# Altium PCB Teeth_Radiology_PCB.PcbDoc (part 2 of 2)
Units mm, origin at the board's own origin, x right, y up, seen from the top; angles counter-clockwise.
Board outline 199.64 x 96.9 mm, 2 copper layers (Top Layer, Bottom Layer); 127 components, 118 nets, 427 pads, 81 vias.
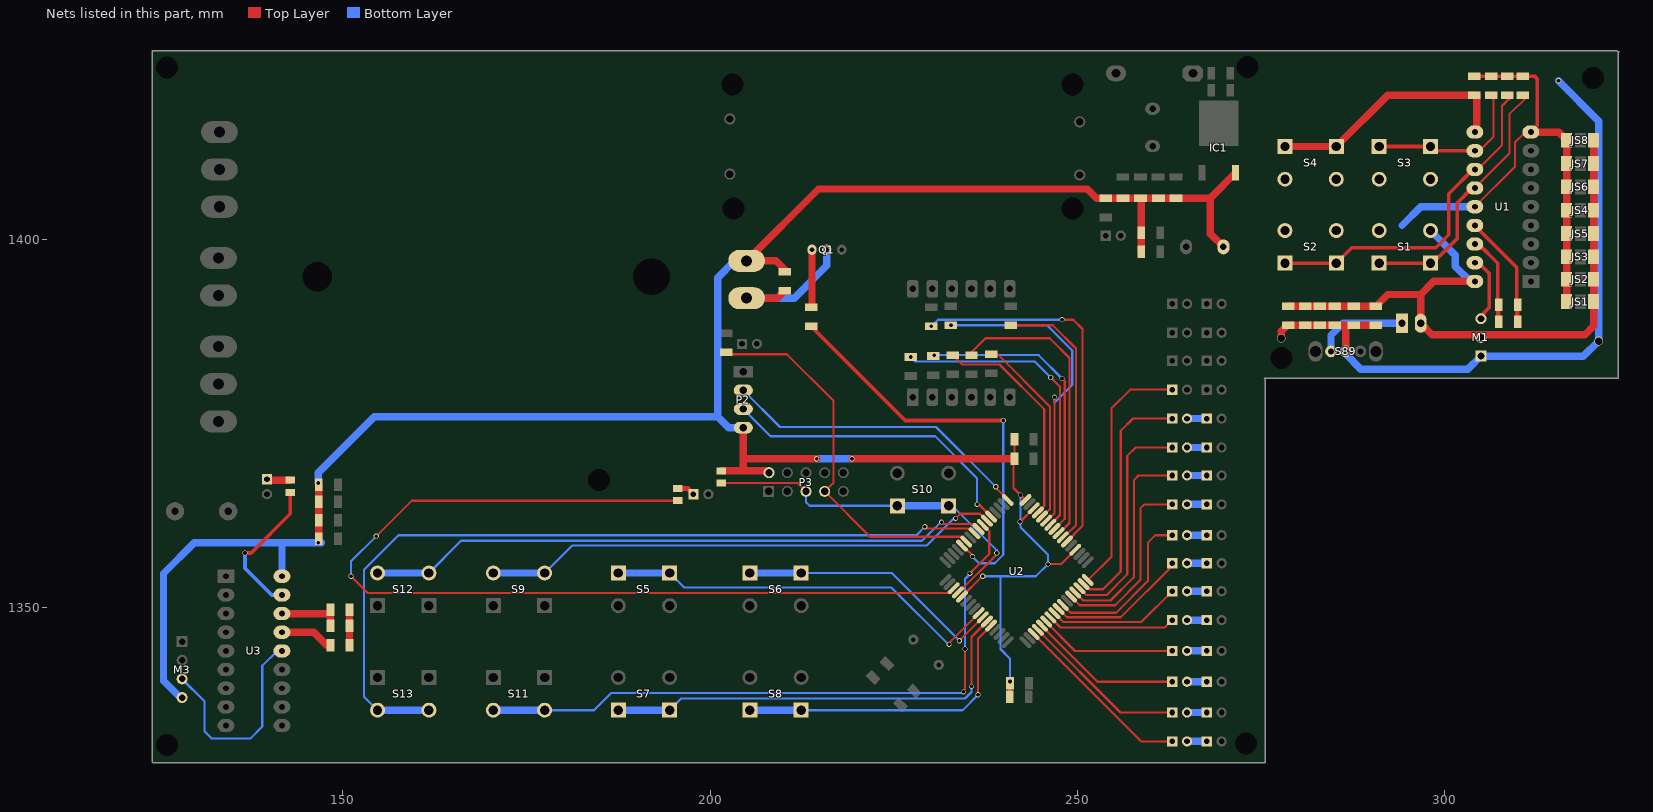
[diagram p2: the nets of this part, all layers, seen from the top]

## Via types
v1: diameter 0.7, hole 0.5, Top Layer to Bottom Layer, 75 vias
v2: diameter 1.2, hole 1, Top Layer to Bottom Layer, 5 vias
v3: diameter 1, hole 0.7, Top Layer to Bottom Layer, 1 vias

## Nets (pads, with @x,y where several pads share a name; then routed paths per layer and width w, separated by ;. In a path a pad name is that pad's centre, name@x,y a point inside that pad or via, vN(x,y) a via of type N, cw(c..) or ccw(c..) an arc to the next point about the centre after c; other vN are vias at no path point) (continued)
NetLED10_1: LED10.1 U2.48 | length 34.1
  Top Layer w0.3: U2.48@251.407,1353.705 251.407,1353.64 254.635,1356.868 254.635,1377.061 257.175,1379.601 LED10.1@262.89,1379.601
NetLED11_1: LED11.1 LED12.2 | length 2.7
  Bottom Layer w1: LED12.2@264.922,1375.664 LED11.1@267.589,1375.664
NetLED12_1: LED12.1 U2.47 | length 33.2
  Top Layer w0.3: U2.47@250.839,1353.137 251.171,1352.804 251.206,1352.804 251.587,1352.423 253.492,1352.423 255.905,1354.836 255.905,1374.013 257.556,1375.664 LED12.1@262.89,1375.664
NetLED13_1: LED13.1 LED14.2 | length 2.7
  Bottom Layer w1: LED14.2@264.922,1371.727 LED13.1@267.589,1371.727
NetLED14_1: LED14.1 U2.46 | length 30.8
  Top Layer w0.3: U2.46@250.273,1352.571 251.183,1351.661 254,1351.661 256.794,1354.455 256.794,1370.584 257.937,1371.727 LED14.1@262.89,1371.727
NetLED15_1: LED15.1 LED17.2 | length 2.7
  Bottom Layer w1: LED17.2@264.922,1335.659 LED15.1@267.589,1335.659
NetLED16_1: LED16.1 LED18.2 | length 2.7
  Bottom Layer w1: LED18.2@264.922,1331.722 LED16.1@267.589,1331.722
NetLED17_1: LED17.1 U2.36 | length 22.9
  Top Layer w0.3: U2.36@244.616,1346.914 255.871,1335.659 LED17.1@262.89,1335.659
NetLED18_1: LED18.1 U2.35 | length 24.9
  Top Layer w0.3: U2.35@244.05,1346.348 258.677,1331.722 LED18.1@262.89,1331.722
NetLED19_1: LED19.1 LED20.2 | length 2.7
  Bottom Layer w1: LED20.2@264.922,1367.917 LED19.1@267.589,1367.917
NetLED20_1: LED20.1 U2.45 | length 29.2
  Top Layer w0.3: U2.45@249.056,1352.52 249.436,1352.141 U2.45@249.707,1352.141 ; U2.45@249.707,1352.005 250.813,1350.899 254.508,1350.899 257.683,1354.074 257.683,1367.282 258.318,1367.917 LED20.1@262.89,1367.917
NetLED21_1: LED21.1 LED22.2 | length 2.7
  Bottom Layer w1: LED22.2@264.922,1339.85 LED21.1@267.589,1339.85
NetLED22_1: LED22.1 U2.37 | length 20.9
  Top Layer w0.3: U2.37@245.182,1347.48 245.182,1347.398 252.73,1339.85 LED22.1@262.89,1339.85
NetLED23_1: LED23.1 LED24.2 | length 2.7
  Bottom Layer w1: LED24.2@264.922,1363.98 LED23.1@267.589,1363.98
NetLED24_1: LED24.1 U2.44 | length 25.6
  Top Layer w0.3: U2.44@249.141,1351.44 250.317,1350.264 255.143,1350.264 258.572,1353.693 258.572,1363.472 259.08,1363.98 LED24.1@262.89,1363.98
NetLED25_1: LED25.1 LED26.2 | length 2.7
  Bottom Layer w1: LED26.2@264.922,1344.041 LED25.1@267.589,1344.041
NetLED26_1: LED26.1 U2.38 | length 18.8
  Top Layer w0.3: U2.38@245.747,1348.045 245.747,1347.976 249.682,1344.041 LED26.1@262.89,1344.041
NetLED27_1: LED27.1 LED28.2 | length 2.7
  Bottom Layer w1: LED28.2@264.922,1348.232 LED27.1@267.589,1348.232
NetLED28_1: LED28.1 U2.39 | length 17.6
  Top Layer w0.3: U2.39@246.313,1348.611 247.708,1347.216 261.874,1347.216 LED28.1@262.89,1348.232
NetLED29_1: LED29.1 LED30.2 | length 2.7
  Bottom Layer w1: LED30.2@264.922,1352.169 LED29.1@267.589,1352.169
NetLED30_1: LED30.1 U2.40 | length 18.4
  Top Layer w0.3: U2.40@247.014,1349.177 U2.40@246.879,1349.177 248.078,1347.978 258.699,1347.978 LED30.1@262.89,1352.169
NetLED31_1: LED31.1 LED32.2 | length 2.7
  Bottom Layer w1: LED32.2@264.922,1355.979 LED31.1@267.589,1355.979
NetLED32_1: LED32.1 U2.41 | length 19.2
  Top Layer w0.3: U2.41@247.444,1349.742 248.574,1348.613 255.905,1348.613 262.89,1355.598 LED32.1@262.89,1355.979
NetLED33_1: LED33.1 LED34.2 | length 2.7
  Bottom Layer w1: LED34.2@264.922,1359.789 LED33.1@267.589,1359.789
NetLED34_1: LED34.1 U2.42 | length 22.7
  Top Layer w0.3: U2.42@248.01,1350.308 249.07,1349.248 255.27,1349.248 259.588,1353.566 259.588,1358.773 260.604,1359.789 LED34.1@262.89,1359.789
NetLED35_1: LED35.1 R20.2 | length 2.5
  Top Layer w0.7: R20.2@195.58,1366.138 196.978,1366.138 LED35.1@197.739,1365.377
NetLED36_1: LED36.1 R21.2 | length 3.2
  Top Layer w1: LED36.1@139.7,1367.409 139.828,1367.281 R21.2@142.875,1367.281
NetM1_2: M1.2 U1.17 | length 8.8
  Top Layer w0.5: U1.17@304.094,1396.873 304.602,1396.873 306.07,1395.405 306.07,1390.777 M1.2@304.927,1389.634
NetM3_2: M3.2 U3.14 | length 29.1
  Bottom Layer w0.3: M3.2@128.143,1340.231 131.191,1337.183 131.191,1333.119 132.207,1332.103 137.414,1332.103 139.065,1333.754 139.065,1342.009 141.097,1344.041 U3.14@141.732,1344.041
NetP1_1: P1.1 S89.1 | length 12.5
  Bottom Layer w1: S89.1@284.512,1384.808 284.512,1386.999 286.155,1388.642 P1.1@294.178,1388.642
NetP2_3: P2.3 U2.5 | length 41.9
  Top Layer w0.3: v1(236.347,1363.98) 236.601,1363.98 U2.5@238.252,1362.329
  Bottom Layer w0.3: P2.3@204.524,1376.964 208.237,1373.251 230.632,1373.251 236.347,1367.536 v1(236.347,1363.98)
NetQ1_2: Q1.2 R8.1 T3.2 | length 20.6
  Top Layer w1: T3.2@204.978,1392.047 209.169,1392.047 R8.1@210.185,1393.063
  Bottom Layer w1: T3.2@204.978,1392.047 211.455,1392.047 215.9,1396.492 Q1.2@215.9,1398.651
NetQ1_3: Q1.3 R10.2 | length 7.8
  Top Layer w1: R10.2@213.868,1390.848 Q1.3@213.868,1398.651
NetR1_1: R1.1 R2.1 U1.15 | length 16.8
  Top Layer w0.5: U1.15@304.094,1401.953 309.809,1396.238 309.809,1389.761 ; R2.1@309.936,1388.872 R1.1@309.936,1391.158
NetR1_2: R1.2 R2.2 U1.16 | length 13.5
  Top Layer w0.5: U1.16@304.094,1399.413 304.602,1399.413 307.213,1396.802 307.213,1389.761 ; R2.2@307.34,1388.872 R1.2@307.34,1391.158
NetR3_2: R3.2 S4.1 U1.10 | length 33.8
  Top Layer w1: S4.1@278.249,1412.684 S4.1@285.234,1412.684 292.227,1419.677 304.348,1419.677 U1.10@304.348,1414.907
NetR4_2: R4.2 S3.1 U1.11 | length 22.2
  Top Layer w0.3: U1.11@304.729,1412.113 306.634,1414.018 R4.2@306.634,1419.677
  Top Layer w0.5: S3.1@291.076,1412.684 S3.1@298.061,1412.684 298.633,1412.113 U1.11@304.094,1412.113 U1.11@304.729,1412.113
NetR5_2: R5.2 S2.1 U1.12 | length 46.7
  Top Layer w0.3: U1.12@304.475,1409.573 307.777,1412.875 307.777,1418.209 R5.2@308.793,1419.225
  Top Layer w0.5: S2.1@278.249,1396.809 S2.1@285.234,1396.809 287.33,1398.905 298.76,1398.905 300.538,1400.683 300.538,1406.271 303.84,1409.573 U1.12@304.094,1409.573 U1.12@304.475,1409.573 ; R5.2@308.793,1419.225 R5.2@308.793,1419.677
NetR6_2: R6.2 S1.1 U1.13 | length 35.5
  Top Layer w0.3: U1.13@304.094,1407.033 308.793,1411.732 308.793,1417.066 R6.2@311.206,1419.479
  Top Layer w0.5: S1.1@291.076,1396.809 S1.1@298.061,1396.809 298.315,1396.809 301.681,1400.175 301.681,1405.001 303.713,1407.033 U1.13@304.094,1407.033
NetR10_1: R10.1 U2.12 | length 57.4
  Top Layer w0.3: U2.12@234.292,1358.369 234.292,1358.233 234.564,1358.233 235.929,1356.868 v1(235.712,1356.868)
  Top Layer w0.5: R10.1@213.741,1388.237 226.568,1375.41 v1(239.903,1375.41)
  Bottom Layer w0.3: v1(235.712,1356.868) 236.601,1355.979 238.76,1355.979 239.903,1357.122 v1(239.903,1375.41)
NetR11_1: R11.1 U2.54 | length 51.3
  Top Layer w0.3: v1(247.904,1389.126) 249.428,1389.126 250.698,1387.856 250.698,1361.057 U2.54@248.576,1358.935
  Bottom Layer w0.3: v1(230.124,1388.237) 231.013,1389.126 v1(247.904,1389.126)
NetR12_1: R12.1 U2.55 | length 36.8
  Top Layer w0.3: R12.1@240.919,1388.364 246.634,1388.364 249.809,1385.189 249.809,1361.164 248.282,1359.636 248.01,1359.636 U2.55@248.01,1359.501
NetR13_1: R13.1 U2.56 | length 40.1
  Top Layer w0.3: R13.1@235.585,1384.3 235.585,1384.681 237.49,1386.586 246.253,1386.586 248.92,1383.919 248.92,1361.44 247.634,1360.154 U2.56@247.396,1360.154
NetR14_1: R14.1 U2.57 | length 39.9
  Top Layer w0.3: U2.57@246.879,1360.632 248.285,1362.038 248.285,1380.744 v1(247.904,1381.125)
  Bottom Layer w0.3: v1(230.505,1384.3) 244.729,1384.3 v1(247.904,1381.125)
NetR15_1: R15.1 U2.58 | length 41.3
  Top Layer w0.3: U2.58@246.313,1361.198 247.642,1362.527 247.642,1379.99 v1(246.38,1381.252)
  Bottom Layer w0.3: v1(227.33,1384.046) 227.965,1383.411 244.221,1383.411 v1(246.38,1381.252)
NetR16_1: R16.1 U2.59 | length 44.3
  Top Layer w0.3: U2.59@245.747,1361.763 245.747,1361.899 246.019,1361.899 246.888,1362.768 v1(246.888,1378.585)
  Bottom Layer w0.3: v1(232.791,1388.364) 245.872,1388.364 249.301,1384.935 249.301,1380.236 246.888,1377.823 v1(246.888,1378.585)
NetR17_1: R17.1 U2.60 | length 25.5
  Top Layer w0.3: R17.1@238.252,1384.427 239.141,1384.427 246.253,1377.315 246.253,1363.322 U2.60@245.833,1362.901
NetR18_1: R18.1 U2.61 | length 29
  Top Layer w0.3: R18.1@233.045,1384.3 234.315,1383.03 239.395,1383.03 245.491,1376.934 245.491,1363.749 U2.61@245.267,1363.524
NetR20_1: R20.1 U2.19 | length 133.1
  Top Layer w0.3: v1(151.13,1354.201) 153.411,1351.92 232.374,1351.92 233.025,1352.571 U2.19@233.161,1352.571 ; v1(154.559,1359.662) 159.385,1364.488 R20.1@195.58,1364.488
  Bottom Layer w0.3: v1(151.13,1354.201) 151.13,1356.233 v1(154.559,1359.662)
NetR21_1: R21.1 U3.17 | length 20.5
  Top Layer w0.5: v1(136.715,1357.376) 137.541,1357.376 142.875,1362.71 R21.1@142.875,1365.631 ; U3.17@141.097,1351.661 U3.17@141.732,1351.661
  Bottom Layer w0.5: v1(136.715,1357.376) 136.715,1355.28 140.335,1351.661 U3.17@141.732,1351.661
NetR22_1: R22.1 R24.1 U3.16 | length 8
  Top Layer w1: U3.16@141.732,1349.121 147.828,1349.121 148.336,1348.613 R22.1@148.336,1347.47
NetR22_2: R22.2 R23.1 R24.2 | length 4.8
  Top Layer w1: R23.1@150.932,1344.803 R22.2@150.932,1347.47 R24.2@150.932,1349.629
NetR23_2: R23.2 U3.15 | length 7.2
  Top Layer w1: U3.15@141.986,1346.327 142.24,1346.581 146.05,1346.581 147.828,1344.803 R23.2@148.336,1344.803
NetS5_1: S5.1 U2.25 | length 54.3
  Top Layer w0.3: v1(232.537,1344.93) 232.537,1345.159 U2.25@236.555,1349.177
  Bottom Layer w0.3: S5.1@194.5,1354.645 196.469,1352.677 224.663,1352.677 232.41,1344.93 v1(232.537,1344.93)
  Bottom Layer w1: S5.1@188.133,1354.645 S5.1@194.5,1354.645
NetS6_1: S6.1 U2.26 | length 36.9
  Top Layer w0.3: v1(233.934,1345.424) U2.26@237.121,1348.611
  Bottom Layer w0.3: S6.1@212.407,1354.645 224.726,1354.645 233.948,1345.424 v1(233.934,1345.424)
  Bottom Layer w1: S6.1@205.422,1354.645 S6.1@212.407,1354.645
NetS7_1: S7.1 U2.27 | length 59.6
  Top Layer w0.3: v1(235.585,1339.215) 235.585,1345.946 235.586,1345.945 U2.27@237.686,1348.045
  Bottom Layer w0.3: S7.1@194.5,1335.976 196.088,1337.564 234.696,1337.564 235.585,1338.453 v1(235.585,1339.215)
  Bottom Layer w1: S7.1@187.516,1335.976 S7.1@194.5,1335.976
NetS8_1: S8.1 U2.28 | length 42.1
  Top Layer w0.3: v1(236.474,1338.072) 236.474,1345.702 U2.28@238.252,1347.48
  Bottom Layer w0.3: S8.1@212.407,1335.976 234.379,1335.976 v1(236.474,1338.072)
  Bottom Layer w1: S8.1@205.422,1335.976 S8.1@212.407,1335.976
NetS9_2: S9.2 U2.6 | length 71
  Top Layer w0.3: v1(233.426,1362.075) 234.061,1362.71 236.74,1362.71 U2.6@237.686,1361.763
  Bottom Layer w0.3: S9.2@177.482,1354.645 181.229,1358.392 229.489,1358.392 233.299,1362.202 v1(233.426,1362.075)
  Bottom Layer w1: S9.2@170.498,1354.645 S9.2@177.482,1354.645
NetS11_2: S11.2 U2.7 | length 89.7
  Top Layer w0.3: v1(234.504,1338.465) 234.504,1338.642 234.696,1338.834 v1(234.696,1344.295) ; v1(235.365,1354.59) 237.998,1357.223 237.998,1360.32 U2.7@237.121,1361.198
  Bottom Layer w0.3: S11.2@177.482,1335.976 184.213,1335.976 186.563,1338.326 234.315,1338.326 234.454,1338.465 v1(234.504,1338.465) ; v1(234.696,1344.295) 234.696,1353.836 235.45,1354.59 v1(235.365,1354.59)
  Bottom Layer w1: S11.2@170.498,1335.976 S11.2@177.482,1335.976
NetS12_2: S12.2 U2.8 | length 85.1
  Top Layer w0.3: v1(231.521,1361.567) 231.775,1361.313 235.874,1361.313 U2.8@236.555,1360.632
  Bottom Layer w0.3: S12.2@161.734,1354.645 166.116,1359.027 228.854,1359.027 231.394,1361.567 v1(231.521,1361.567)
  Bottom Layer w1: S12.2@154.749,1354.645 S12.2@161.734,1354.645
NetS13_2: S13.2 U2.9 | length 112.7
  Top Layer w0.3: v1(229.235,1360.932) 229.45,1360.717 235.203,1360.717 235.853,1360.066 U2.9@235.989,1360.066
  Bottom Layer w0.3: S13.2@154.749,1335.976 152.908,1337.818 152.908,1355.09 157.607,1359.789 228.092,1359.789 v1(229.235,1360.932)
  Bottom Layer w1: S13.2@154.749,1335.976 S13.2@161.734,1335.976
PEN: P2.2 U2.1 | length 42.3
  Top Layer w0.3: v1(238.887,1366.393) 238.887,1366.266 240.515,1364.638 U2.1@240.515,1364.592
  Bottom Layer w0.3: P2.2@204.524,1379.504 209.507,1374.521 230.759,1374.521 v1(238.887,1366.393)
RGND: C273.1 C274.1 C275.1 C279.1 C285.1 C289.1 JS1.1 JS2.1 JS3.1 JS4.1 JS5.1 JS6.1 JS7.1 JS8.1 M1.0 R3.1 R4.1 R5.1 R6.1 S89.2 U1.9 U1.14 | length 160.6
  Top Layer w0.3: U1.14@304.094,1404.493 309.555,1409.954 309.555,1413.256 310.952,1414.653 U1.9@311.206,1414.653
  Top Layer w0.5: R3.1@304.348,1422.273 306.634,1422.273 308.793,1422.273 310.825,1422.273 312.222,1422.273 312.603,1421.892 312.603,1415.542 U1.9@311.714,1414.653 U1.9@311.206,1414.653
  Top Layer w1: v2(277.749,1386.586) 277.749,1387.546 278.567,1388.364 C273.1@278.694,1388.364 C274.1@280.98,1388.364 C275.1@283.012,1388.364 C289.1@285.044,1388.364 C285.1@287.584,1388.364 C279.1@290.632,1388.364 ; S89.2@286.512,1384.808 286.512,1388.237 ; U1.9@311.714,1414.653 315.498,1414.653 JS8.1@316.591,1413.561 JS7.1@316.591,1410.386 JS6.1@316.591,1407.211 JS4.1@316.591,1404.036 JS5.1@316.591,1400.861 JS3.1@316.591,1397.686 JS2.1@316.591,1394.638 JS1.1@316.591,1391.59
  Bottom Layer w1: S89.2@286.512,1384.808 286.512,1384.469 288.586,1382.395 303.149,1382.395 M1.0@304.927,1384.173 304.927,1384.132 318.856,1384.132 v2@320.929,1386.205 ; 294.178,1401.943 296.728,1404.493 U1.14@304.094,1404.493 ; v1(315.468,1421.638) 320.964,1416.142 v2(320.964,1386.205)
RST: P3.5 R19.2 S10.1 U2.20 | length 50
  Top Layer w0.3: R19.2@201.549,1366.902 201.549,1366.906 211.906,1366.906 P3.5@213.06,1365.752 ; U2.20@233.847,1352.005 239.014,1357.172 v1(239.014,1357.376)
  Bottom Layer w0.3: P3.5@213.06,1365.752 213.06,1364.28 213.55,1363.789 S10.1@225.488,1363.789 ; S10.1@232.474,1363.789 232.981,1363.789 239.014,1357.757 v1(239.014,1357.376)
  Bottom Layer w1: S10.1@225.488,1363.789 S10.1@232.474,1363.789
RVCC: C273.2 C274.2 C275.2 C279.2 C285.2 C289.2 JS1.3 JS2.3 JS3.3 JS4.3 JS5.3 JS6.3 JS7.3 JS8.3 M1.1 P1.2 S1.2 S2.2 S3.2 S4.2 U1.18 | length 90.5
  Top Layer w1: C273.2@278.694,1390.96 C274.2@280.98,1390.96 C275.2@283.012,1390.96 C289.2@285.044,1390.96 C285.2@287.584,1390.96 C279.2@290.632,1390.96 292.217,1392.545 296.718,1392.545 ; U1.18@304.094,1394.333 298.506,1394.333 296.718,1392.545 ; JS8.3@320.274,1413.561 JS7.3@320.274,1410.386 JS6.3@320.274,1407.211 JS4.3@320.274,1404.036 JS5.3@320.274,1400.861 JS3.3@320.274,1397.686 JS2.3@320.274,1394.638 JS1.3@320.274,1391.59 320.274,1388.288 319.08,1387.094 298.266,1387.094 P1.2@296.718,1388.642 296.718,1392.545
  Bottom Layer w0.5: U1.18@303.459,1394.333 U1.18@304.094,1394.333
  Bottom Layer w1: S1.2@298.061,1401.255 301.427,1397.889 301.427,1396.365 U1.18@303.459,1394.333
SCK: P3.7 R9.1 U2.11 | length 52.4
  Top Layer w0.3: R9.1@202.184,1384.681 202.819,1384.681 202.819,1384.427 210.439,1384.427 216.789,1378.077 216.789,1366.941 P3.7@215.6,1365.752 221.766,1359.586 234.071,1359.586 234.722,1358.935 U2.11@234.858,1358.935
VCC: C1.1 C2.1 C3.1 C5.1 C8.1 C9.1 C11.2 C13.1 C14.1 C15.1 C16.1 D2.1 D3.1 D4.1 D5.1 IC1.3 M3.3 P2.4 P3.2 R7.1 R8.2 R19.1 T3.1 U2.21 U2.52 U2.62 U2.64 U3.18 | length 339.8
  Top Layer w0.3: U2.21@234.292,1351.44 237.054,1354.201 v1(237.109,1354.201) ; C15.1@241.3,1370.203 241.3,1366.211 v1(242.261,1365.25) U2.64@242.919,1364.592 ; C15.1@241.427,1370.203 C14.1@241.427,1372.87 ; v1(242.189,1361.599) U2.62@244.05,1363.46 ; v1(245.999,1355.852) 247.777,1355.852 U2.52@249.707,1357.782
  Top Layer w0.5: C13.1@240.792,1337.564 C16.1@240.792,1339.629 ; C16.1@240.828,1339.664 v1(240.828,1339.886)
  Top Layer w1: v1(146.685,1366.901) C8.1@146.756,1366.83 ; C11.2@146.756,1359.281 C1.1@146.756,1361.821 C9.1@146.756,1364.361 C8.1@146.756,1366.647 ; R19.1@201.549,1368.552 207.772,1368.552 P3.2@208.026,1368.298 ; 204.524,1368.806 204.524,1370.203 ; P2.4@204.524,1374.424 204.524,1370.203 ; R8.2@210.185,1395.913 208.971,1397.127 T3.1@204.978,1397.127 214.757,1406.906 251.333,1406.906 252.603,1405.636 R7.1@253.873,1405.636 D2.1@256.16,1405.636 ; v1(214.503,1370.203) 204.524,1370.203 ; v1(219.329,1370.203) 241.3,1370.203 C15.1@241.427,1370.203 ; D2.1@256.189,1405.665 D3.1@258.602,1405.665 D4.1@261.015,1405.665 D5.1@263.428,1405.665 268.071,1405.665 ; C2.1@258.676,1398.397 C3.1@258.676,1400.937 D3.1@258.676,1405.591 ; C5.1@269.875,1399.032 268.071,1400.836 268.071,1405.665 ; IC1.3@271.525,1409.119 268.071,1405.665
  Bottom Layer w0.3: v1(237.109,1354.201) 239.522,1354.201 ; v1(240.828,1339.886) 240.828,1342.989 239.522,1344.295 239.522,1354.201 ; v1(242.261,1365.25) 242.261,1360.86 245.999,1357.122 v1(245.999,1355.852) 244.348,1354.201 239.522,1354.201
  Bottom Layer w1: M3.3@128.143,1337.691 127.889,1337.691 125.603,1339.977 125.603,1354.582 129.794,1358.773 141.732,1358.773 ; U3.18@141.732,1354.201 141.732,1358.773 ; v1(146.685,1366.901) 146.685,1368.298 154.305,1375.918 201.041,1375.918 ; 147.066,1358.773 141.732,1358.773 ; P2.4@204.524,1374.424 202.535,1374.424 201.041,1375.918 ; T3.1@204.978,1397.127 203.327,1397.127 201.041,1394.841 201.041,1375.918 ; v1(214.503,1370.203) v1(219.329,1370.203)
  other v1: 146.685,1358.773
pads on no net: M2.4 M2.5 M2.6 M2.7 M3.1 P3.3 S89.3 S89.M2
copper on no net: | length 120.5
  Top Layer w0.3: v3@128.905,1347.265 130.445,1347.265 130.445,1348.073 127.365,1348.073 127.365,1348.881 130.445,1348.881 130.445,1349.689 127.365,1349.689 127.365,1350.497 130.445,1350.497 130.445,1351.305 127.365,1351.305 127.365,1352.113 130.445,1352.113 130.445,1352.921 127.365,1352.921 127.365,1353.729 130.445,1353.729 130.445,1354.537 127.365,1354.537 127.365,1355.345 130.445,1355.345 130.445,1356.153 127.365,1356.153 127.365,1356.961 130.445,1356.961 130.445,1357.769 127.365,1357.769 127.365,1358.577 130.445,1358.577 130.445,1359.385 128.905,1359.385 v2@128.905,1359.789 ; v2@307.017,1385.586 307.825,1385.586 307.825,1382.506 308.633,1382.506 308.633,1385.586 309.441,1385.586 309.441,1382.506 310.249,1382.506 310.249,1385.586 311.057,1385.586 311.057,1382.506 311.865,1382.506 311.865,1385.586 312.673,1385.586 312.673,1382.506 313.481,1382.506 313.481,1385.586 314.289,1385.586 314.289,1382.506 315.097,1382.506 315.097,1385.586 315.905,1385.586 315.905,1382.506 316.713,1382.506 316.713,1385.586 317.521,1385.586 317.521,1382.506 318.329,1382.506 318.329,1385.586 319.137,1385.586 319.137,1382.506 319.945,1382.506 319.945,1384.046 v2(321.091,1384.046)
  other v2: 128.905,1360.297 307.269,1385.586
  other v3: 128.524,1347.089

## Polygon pours and split planes (outlines as drawn)
RGND on Top Layer "Top Layer-No Net" (hatched 45Degree grid 0.5 track 0.303, remove dead copper, pour order 0): 322.326,1424.432 322.453,1424.305 322.453,1382.014 296.037,1382.014 295.656,1381.633 295.529,1381.76 295.529,1387.475 275.844,1387.475 275.59,1387.221 275.59,1414.145 284.226,1414.145 290.195,1420.114 290.322,1420.241 290.322,1424.559 290.703,1424.178 323.088,1424.178

## Other copper
Top Layer:
  region net RVCC: 298.76,1400.048 298.76,1409.954 277.424,1409.954 277.424,1400.048
  rectangle net EX: 130.302,1395.476 136.779,1406.398
  region net VCC: 241.427,1372.743 238.633,1369.949 241.427,1369.949
  region net VCC: 241.3,1366.266 236.982,1370.584 240.919,1370.584 241.3,1370.203
  region net RVCC: 291.267,1391.285 296.347,1391.285 297.363,1392.301 296.855,1392.809 292.537,1392.809 291.14,1391.412
  region net RVCC: 300.665,1394.079 300.538,1393.952 300.538,1387.221 298.633,1387.221 296.982,1388.872 296.982,1393.063 297.617,1393.063 298.76,1394.206 300.411,1394.206
  region net NetR3_2: 304.602,1415.161 304.602,1419.733 304.475,1419.606 292.156,1419.606 292.156,1419.225 288.092,1415.161
  region net N: 135.763,1391.158 135.509,1391.158 133.096,1393.571 131.445,1391.92 131.445,1386.84 131.572,1386.713 135.89,1391.031
  region net VCC: 210.947,1395.984 210.947,1403.35 205.359,1397.762 205.359,1397.381 208.717,1397.381 208.971,1397.127
  region net RGND: 312.039,1422.527 315.722,1422.527 316.23,1422.019 316.23,1414.526 312.928,1414.526 312.039,1415.415
  region net VCC: 269.875,1399.032 269.947,1399.104 269.947,1407.541 269.875,1407.541 267.716,1405.382 268.071,1405.027 268.071,1400.836
  region net GND: 261.62,1401.318 264.414,1401.318 265.557,1400.175 265.557,1398.016 265.176,1397.635 261.62,1397.635 261.62,1401.064 261.493,1401.191
  region net GND: 263.779,1408.557 263.779,1412.748 254,1412.748 254,1412.24 250.444,1408.684 263.652,1408.684
  region net GND: 260.223,1413.002 260.985,1413.002 266.7,1418.717 266.7,1413.002 260.477,1413.002 260.223,1412.748
  region net GND: 137.922,1370.33 137.922,1365.25 129.921,1365.25 129.794,1365.377 134.331,1369.914 134.331,1370.203 137.668,1370.203 137.795,1370.33
  region net GND: 126.492,1362.075 126.555,1362.011 126.555,1334.96 125.349,1336.167 125.476,1336.294 125.476,1361.694 126.492,1362.71
  region net GND: 127.508,1344.549 125.857,1342.898 125.857,1347.597 125.984,1347.724 127.889,1345.819 127.889,1344.93
  region net A6: 136.271,1336.802 141.224,1331.849 137.922,1331.849 136.271,1333.5
  region net GND: 241.046,1361.587 241.093,1361.587 245.618,1357.062 241.046,1357.062
  region net GND: 245.618,1357.062 242.63,1354.074 238.312,1354.074 238.185,1354.201 241.046,1357.062
  region net GND: 241.534,1362.075 241.554,1362.055 241.554,1360.805 240.919,1361.44 241.427,1361.948 241.427,1361.968
  region net GND: 244.729,1356.614 242.443,1354.328 242.57,1354.201 244.729,1354.201
  region net GND: 244.475,1354.963 244.602,1354.963 245.364,1354.201 243.967,1354.201 243.967,1354.455
  region net +12: 268.859,1420.495 263.553,1420.495 265.712,1422.654 268.605,1422.654 268.605,1420.749
  region net SCK: 216.789,1374.394 216.789,1378.077 210.439,1384.427 206.756,1384.427
  region net VCC: 210.82,1399.159 218.186,1406.525 218.186,1406.652 215.011,1406.652 214.757,1406.906 209.804,1401.953 209.423,1401.953 209.423,1400.556
  region net GND: 218.14,1371.219 221.361,1374.44 221.361,1374.521 219.583,1374.521 218.14,1373.078
  region net GND: 152.146,1370.584 146.939,1370.584 146.685,1370.33 149.225,1367.79 149.352,1367.79
  region net GND: 199.771,1367.917 197.421,1370.266 199.644,1372.489 199.644,1369.06 199.771,1368.933
  region net GND: 223.075,1336.04 225.933,1336.04 226.187,1336.294 222.123,1340.358 218.757,1340.358
  region net GND: 250.952,1329.944 233.172,1329.944 226.949,1336.167 242.062,1336.167 243.078,1337.183 243.713,1337.183
  region net GND: 223.075,1336.04 229.362,1329.944 233.172,1329.944 233.172,1330.325 227.33,1336.167 227.203,1336.04
  region net GND: 137.795,1368.933 139.192,1370.33 137.287,1370.33 137.287,1368.806 137.033,1368.552
  region net GND: 137.795,1366.774 138.811,1365.758 138.811,1365.631 137.414,1365.631 137.287,1365.758 137.541,1366.012 137.541,1366.774
  region net GND: 256.286,1415.542 250.317,1409.573 259.715,1409.573 259.715,1410.462 264.795,1415.542
  region net GND: 271.399,1419.648 271.399,1417.32 270.002,1417.32 269.24,1418.082 270.764,1419.606 270.764,1419.86
  region net VCC: 258.953,1403.604 261.015,1405.665 256.54,1405.382 256.765,1405.665 258.699,1403.731
  text "EHP" at 285.115,1417.701 h1 r90
  text "Dr.Egg" at 282.829,1416.177 h1 r90
  text "RC-CNTRL" at 280.416,1415.415 h1 r90
  text "EHSANSH" at 278.257,1414.78 h1.2 r90
Bottom Layer:
  rectangle net GND: 154.051,1339.85 213.233,1351.534
  region net GND: 210.185,1370.33 210.185,1368.044 212.812,1368.044 213.06,1368.292 211.328,1370.024 211.328,1370.33
  region net VCC: 201.041,1385.57 191.135,1375.664 200.406,1375.664 201.041,1376.299
  region net VCC: 202.692,1374.013 192.786,1374.013 191.135,1375.664 191.452,1375.981 200.977,1375.981 202.535,1374.424
  region net VCC: 192.786,1374.013 153.035,1374.013 155.067,1376.045 193.167,1376.045 194.818,1374.394
  region net VCC: 141.732,1354.201 145.796,1358.265 145.796,1358.773 138.557,1358.773 137.668,1358.265
  region net VCC: 132.588,1358.519 125.603,1351.534 125.603,1354.582 129.794,1358.773 130.048,1358.519
  region net VCC: 127,1353.566 127,1338.834 126.873,1338.707 125.603,1339.977 125.603,1352.169
  region net NetM3_2: 139.065,1342.136 136.779,1339.85 136.779,1339.469 136.779,1332.103 137.414,1332.103 139.065,1333.754
  region net NetM3_2: 131.191,1333.627 132.715,1332.103 132.207,1332.103 131.191,1333.119
  region net NetM3_2: 135.763,1332.23 137.033,1332.23 137.033,1333.5
  region net NetM3_2: 131.953,1332.484 132.334,1332.103 136.017,1332.103 136.398,1332.484
  region net GND: 268.605,1353.693 269.367,1352.931 269.367,1355.217 269.494,1355.344 269.367,1355.471 269.367,1355.598 268.478,1354.582
  region net GND: 210.312,1369.441 209.042,1370.711 210.312,1370.711 210.439,1370.584 210.439,1369.441
  region net VCC: 146.685,1366.901 155.194,1375.41 154.559,1376.045 154.051,1376.045 146.431,1368.425 146.431,1367.028
  region net GND: 255.778,1400.81 255.778,1408.303 255.778,1413.637 264.287,1413.637 264.287,1399.032 257.556,1399.032
  region net GND: 269.367,1392.936 269.367,1393.063 261.493,1400.937 263.144,1402.588 264.16,1402.588 264.16,1401.953 270.129,1395.984 270.129,1392.936 269.621,1392.428
  text "EHSANSH" at 255.27,1347.851 h1.2
  text "TeethRadiology Main" at 259.969,1345.819 h1
  text "Dr.Egg" at 253.619,1343.533 h1
  text "EHP" at 252.095,1341.247 h1
  text "2017-June" at 254.635,1338.961 h1

## Silkscreen, mask and mechanical layers (free items; w line width, h text height)
Top Overlay:
  lines w0.254: 322.707,1424.305 275.844,1424.305 275.844,1381.76 322.707,1381.76 322.707,1424.432 ; 124.079,1329.182 124.079,1423.543 124.206,1423.67 124.206,1425.448 124.079,1425.575 275.082,1425.575 275.082,1329.182 124.079,1329.182 ; 137.033,1370.33 137.033,1418.59 200.025,1418.59 200.025,1370.33 140.208,1370.33 137.033,1370.33
  text "Main Board" at 135.509,1421.638 h2
  text "Remote" at 289.179,1418.209 h2
  text "4 /  / DC /  / 3" at 199.136,1400.556 h1.52 r180
  text "1 /  / AC /  / 2" at 143.002,1400.429 h1.52 r180
Mechanical 1:
  lines w0.254: 275.773,1381.76 322.255,1381.76 322.509,1382.014 322.509,1424.432 322.382,1424.305 275.9,1424.305 275.773,1424.178 275.773,1381.887 ; 123.952,1329.182 275.209,1329.182 275.082,1329.309 275.082,1425.575 124.079,1425.575 124.079,1329.309 123.952,1329.182

## Text inside footprints (layer, text, board x,y; h text height)
B1: Top Overlay "+" at 133.653,1365.334 h1.7
DS1: Top Overlay "12" at 223.774,1392.682 h1.52; Top Overlay "1" at 224.536,1377.823 h1.52
P3: Top Overlay "10" at 220.546,1367.458 h1.2 r90; Top Overlay "9" at 220.446,1365.358 h1.2 r90; Top Overlay "2" at 206.52,1367.892 h1.2 r90; Top Overlay "1" at 206.52,1365.592 h1.2 r90
Q1: Top Overlay "1" at 217.195,1396.841 h0.7; Top Overlay "3" at 214.427,1396.746 h0.7